# EAGLE board 27c322_adapter (EAGLE 7.6.0)
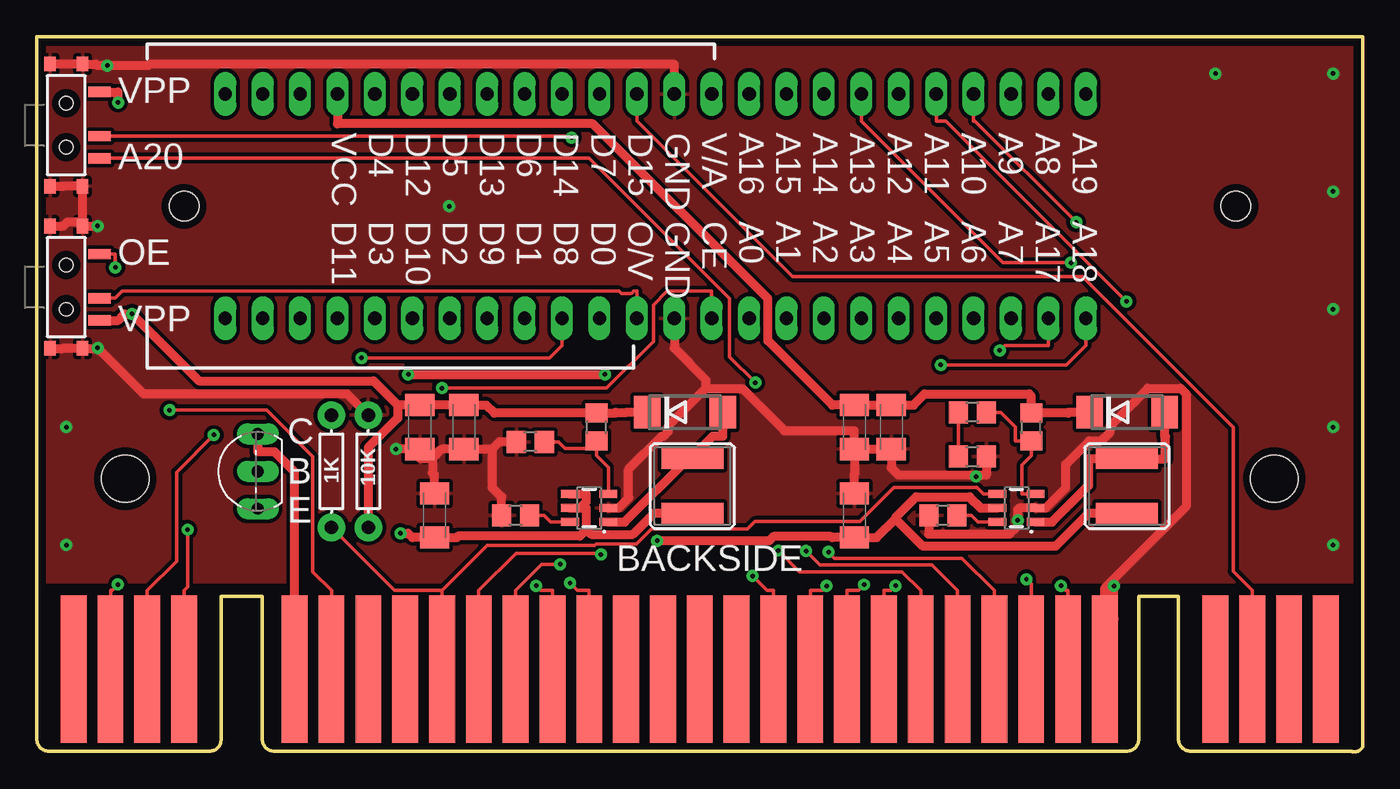
[diagram p0: board, top side]
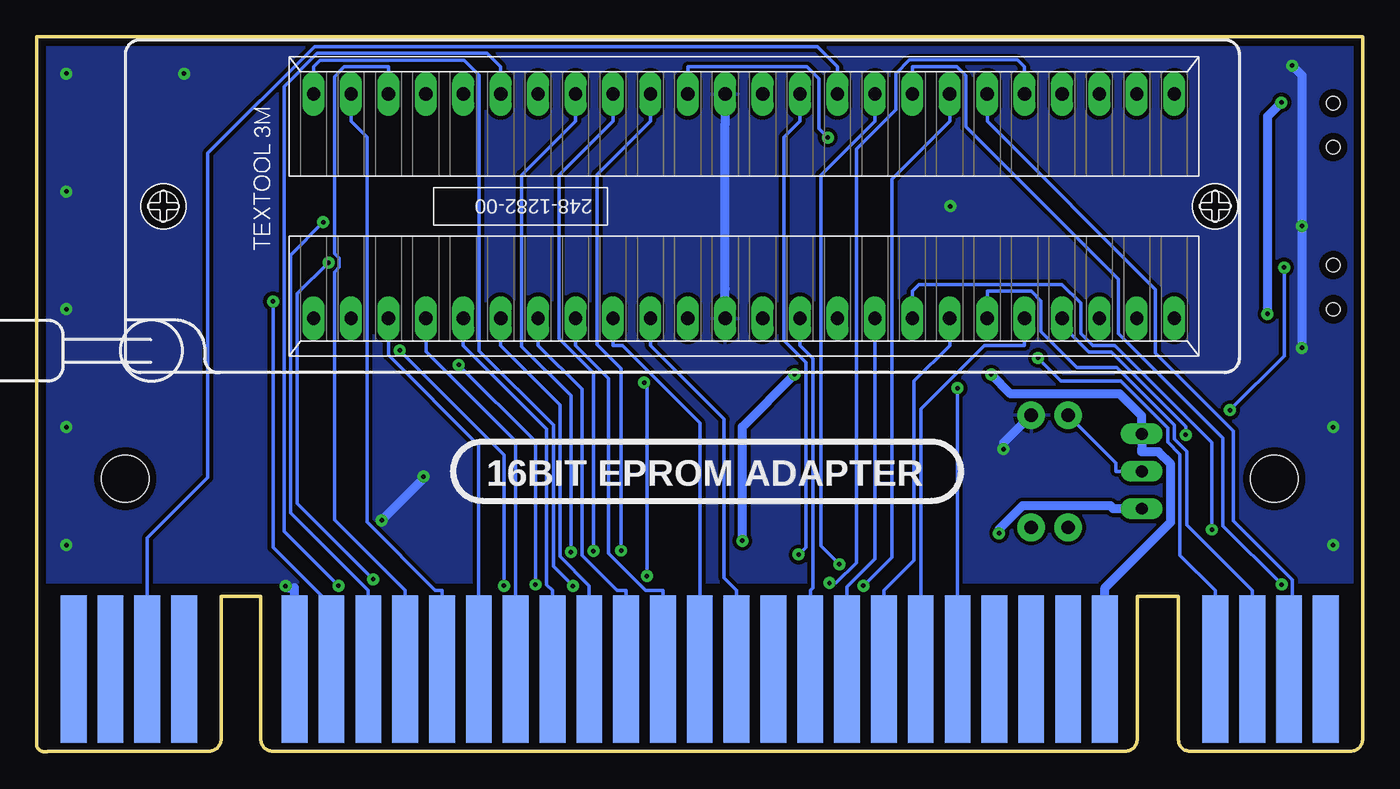
[diagram p1: board, bottom side, seen from below]

Size 90 x 48.55 mm. Coordinates in mm from the lower left corner, seen from the top.
Outline: 0,3.75 0,13.55 0,48.55 90,48.55 90,13.55 90,0.35 arc-90 89.2,0.05 78.9,0.05 78.3,0.05 arc-90 77.5,0.85 77.5,10.55 74.8,10.55 74.8,0.85 arc-90 74,0.05 16.1,0.05 arc-90 15.3,0.85 15.3,10.55 12.5,10.55 12.5,0.85 arc-90 11.8,0.05 0.8,0.05 arc-90 0,0.85
Outline: 0,3.75 0,0.85
Outline: 0,0.85 0,3.75
Outline: 0,3.75 0,0.85
Copper layers (1*16): Top 0.035mm / dielectric 1.5mm / Bottom 0.035mm
Design rules "SparkFun_small": minimum track width 8mil, minimum drill 12mil, track to track 8mil, track to pad 8mil, pad to pad 8mil, via to via 8mil, smd to smd 8mil, copper to edge 20mil, drill to drill 12mil, minimum pad ring 12mil, minimum via ring 10mil, stop-mask expansion 4mil, vias tented up to drill 25mil, thermal gap 10mil
Net classes: 0 default: width 0.254 mm, drill 0.305 mm, clearance 0.203 mm; 1 power: width 0.61 mm, drill 0.406 mm, clearance 0.203 mm; 2 gnd: width 0.61 mm, drill 0.406 mm, clearance 0.203 mm; 3 power usb: width 0.61 mm, drill 0.406 mm, clearance 0.203 mm
Holes 3.2 mm at 84,18.55 6,18.55

## Footprints (pad centres in the part's own frame; a part is rotated, then mirrored left to right if it is on the bottom)
C1206K = smd 1.5 x 2: 1 -1.5,0; 2 1.5,0
DO214AA = smd 1.8 x 2.2: A 2.55,0; C -2.55,0
CR54 = smd 4.2 x 1.4: P$1 0,1.85; P$2 0,-1.85
SMD-SWITCH = smd 0.7 x 1.5: O -2.25,2.25; P 0.75,2.25; S 2.25,2.25 | smd 1 x 0.8: P$1 -4.15,1.1; P$2 -4.15,-1.1; P$3 4.15,-1.1; P$4 4.15,1.1 | hole 0.9: -1.5,0; 1.5,0
AXIAL-0.3 = drill 0.9 pad 1.88: P$1 -3.81,0; P$2 3.81,0
R0805 = smd 1.3 x 1.5: 1 -0.95,0; 2 0.95,0
SOT23-6 = smd 0.55 x 1.2: 1 0.95,1.3; 2 0,1.3; 3 -0.95,1.3; 4 -0.95,-1.3; 5 0,-1.3; 6 0.95,-1.3
TO92-CBE = drill 0.813 long: B 0,0; C -2.54,0; E 2.54,0
CART-EXP-PINS-LONG = smd 1.75 x 10 bottom: 1 42.5,-1.42; 2 40,-1.42; 3 37.5,-1.42; 4 35,-1.42; 5 27.5,-1.42; 6 25,-1.42; 7 22.5,-1.42; 8 20,-1.42; 9 17.5,-1.42; 10 15,-1.42; 11 12.5,-1.42; 12 10,-1.42; 13 7.5,-1.42; 14 5,-1.42; 15 2.5,-1.42; 16 0,-1.42; 17 -2.5,-1.42; 18 -5,-1.42; 19 -7.5,-1.42; 20 -10,-1.42; 21 -12.5,-1.42; 22 -15,-1.42; 23 -17.5,-1.42; 24 -20,-1.42; 25 -22.5,-1.42; 26 -25,-1.42; 27 -27.5,-1.42; 28 -35,-1.42; 29 -37.5,-1.42; 30 -40,-1.42; 31 -42.5,-1.42 | smd 1.75 x 10: 32 42.5,-1.42; 33 40,-1.42; 34 37.5,-1.42; 35 35,-1.42; 36 27.5,-1.42; 37 25,-1.42; 38 22.5,-1.42; 39 20,-1.42; 40 17.5,-1.42; 41 15,-1.42; 42 12.5,-1.42; 43 10,-1.42; 44 7.5,-1.42; 45 5,-1.42; 46 2.5,-1.42; 47 0,-1.42; 48 -2.5,-1.42; 49 -5,-1.42; 50 -7.5,-1.42; 51 -10,-1.42; 52 -12.5,-1.42; 53 -15,-1.42; 54 -17.5,-1.42; 55 -20,-1.42; 56 -22.5,-1.42; 57 -25,-1.42; 58 -27.5,-1.42; 59 -35,-1.42; 60 -37.5,-1.42; 61 -40,-1.42; 62 -42.5,-1.42
248-1282-00-0602J = drill 0.9 long: 1 -29.21,-7.62; 2 -26.67,-7.62; 3 -24.13,-7.62; 4 -21.59,-7.62; 5 -19.05,-7.62; 6 -16.51,-7.62; 7 -13.97,-7.62; 8 -11.43,-7.62; 9 -8.89,-7.62; 10 -6.35,-7.62; 11 -3.81,-7.62; 12 -1.27,-7.62; 13 1.27,-7.62; 14 3.81,-7.62; 15 6.35,-7.62; 16 8.89,-7.62; 17 11.43,-7.62; 18 13.97,-7.62; 19 16.51,-7.62; 20 19.05,-7.62; 21 21.59,-7.62; 22 24.13,-7.62; 23 26.67,-7.62; 24 29.21,-7.62; 25 29.21,7.62; 26 26.67,7.62; 27 24.13,7.62; 28 21.59,7.62; 29 19.05,7.62; 30 16.51,7.62; 31 13.97,7.62; 32 11.43,7.62; 33 8.89,7.62; 34 6.35,7.62; 35 3.81,7.62; 36 1.27,7.62; 37 -1.27,7.62; 38 -3.81,7.62; 39 -6.35,7.62; 40 -8.89,7.62; 41 -11.43,7.62; 42 -13.97,7.62; 43 -16.51,7.62; 44 -19.05,7.62; 45 -21.59,7.62; 46 -24.13,7.62; 47 -26.67,7.62; 48 -29.21,7.62 | hole 2: -39.4,0; 32,0

## Placement (x,y rotation side)
C1  [C1206K]  27,16.05 90 top
C2  [C1206K]  26,22.05 270 top
C3  [C1206K]  29,22.05 270 top
C4  [C1206K]  55.5,16.05 90 top
C5  [C1206K]  55.5,22.05 270 top
C6  [C1206K]  58,22.05 270 top
D1  [DO214AA]  74,23.05 0 top
D2  [DO214AA]  44,23.05 0 top
L1  47µH/±30%/750mA  [CR54]  74,18.05 0 top
L2  47µH/±30%/750mA  [CR54]  44.5,18.05 0 top
OEVPP  SMD-SWITCH  [SMD-SWITCH]  2,31.55 270 top
OEVPP1  SMD-SWITCH  [SMD-SWITCH]  2,42.55 270 top
R1  10K  [AXIAL-0.3]  22.5,19.05 90 top
R2  1K  [AXIAL-0.3]  20,19.05 270 top
R3  30K  [R0805]  61.5,16.05 180 top
R4  10K  [R0805]  63.5,23.05 180 top
R5  191K  [R0805]  67.5,22.05 90 top
R6  30K  [R0805]  32.5,16.05 180 top
R7  10K  [R0805]  33.5,21.05 180 top
R8  191K  [R0805]  38,22.05 90 top
R10  10k  [R0805]  63.5,20.05 0 top
STEPUP_VCC  MCP4725  [SOT23-6]  66.5,16.55 270 top
STEPUP_VPP  MCP4725  [SOT23-6]  37.5,16.55 270 top
T_VPP  [TO92-CBE]  15,19.05 270 top
U$1  CART-EXP-EDGE  [CART-EXP-PINS-LONG]  45,7.05 0 top
ZX1  248-1282-00-0602J  [248-1282-00-0602J]  42,37.05 0 bottom

## Library data of the parts
C1-C6 R3-R8 R10 = resistor
D1 D2 = Arduino_MEGA_2560-Rev3
L1 L2 = SparkFun-Coils; PROD_ID: NDUC-10789
OEVPP OEVPP1 = !sanni; PROD_ID: SWCH-10651
R1 R2 = !sanni; PROD_ID: RES-9435
STEPUP_VCC STEPUP_VPP = !sanni; PROD_ID: IC-08886
T_VPP = transistor-neu-to92
U$1 = snes_cart_mod4
ZX1 = con-3m; MF: 3M; MPN: 248-1282-00-0602J; OC_FARNELL: 9897488; OC_NEWARK: 85K7866

## Nets
A0: U$1.17 ZX1.10
A1: U$1.16 ZX1.9
A2: U$1.15 ZX1.8
A3: U$1.14 ZX1.7
A4: U$1.13 ZX1.6
A5: U$1.12 ZX1.5
A6: U$1.11 ZX1.4
A7: U$1.10 ZX1.3
A8: U$1.9 ZX1.47
A9: U$1.8 ZX1.46
A9_12V: U$1.35
A10: U$1.7 ZX1.45
A11: U$1.6 ZX1.44
A12: U$1.37 ZX1.43
A13: U$1.38 ZX1.42
A14: U$1.39 ZX1.41
A15: U$1.40 ZX1.40
A16: U$1.41 ZX1.39
A17: U$1.42 ZX1.2
A18: U$1.43 ZX1.1
A19: U$1.44 ZX1.48
A20: OEVPP1.S U$1.45
CART: U$1.49
CE: U$1.23 ZX1.11
DQ0: U$1.19 ZX1.14
DQ1: U$1.20 ZX1.16
DQ2: U$1.21 ZX1.18
DQ3: U$1.22 ZX1.20
DQ4: U$1.50 ZX1.29
DQ5: U$1.51 ZX1.31
DQ6: U$1.52 ZX1.33
DQ7: U$1.53 ZX1.35
DQ8: U$1.28 ZX1.15
DQ9: U$1.59 ZX1.17
DQ10: U$1.29 ZX1.19
DQ11: U$1.60 ZX1.21
DQ12: U$1.30 ZX1.30
DQ13: U$1.61 ZX1.32
DQ14: U$1.3 ZX1.34
DQ15: U$1.34 ZX1.36
FB_VCC: R4.1 R5.1 STEPUP_VCC.3
FB_VPP: R7.1 R8.1 STEPUP_VPP.3
GND [gnd]: C1.2 C2.2 C3.2 C4.2 C5.2 C6.2 OEVPP1.P$1 OEVPP1.P$2 OEVPP1.P$3 OEVPP1.P$4 OEVPP.P$1 OEVPP.P$2 OEVPP.P$3 OEVPP.P$4 R1.P$2 R3.2 R6.2 R7.2 R10.2 STEPUP_VCC.2 STEPUP_VPP.2 U$1.5 U$1.36 ZX1.12 ZX1.37
N$1: R2.P$1 T_VPP.B
N$2: R4.2 R10.1
NC_VCC: R3.1 STEPUP_VCC.6
NC_VPP: R6.1 STEPUP_VPP.6
OE: OEVPP.O U$1.57
OEVPP: OEVPP.P ZX1.13
REFRESH: U$1.33
RST: U$1.26
SW_VCC [power usb]: D1.A L1.P$1 STEPUP_VCC.1
SW_VPP [power usb]: D2.A L2.P$1 STEPUP_VPP.1
VCC [power]: C4.1 L1.P$2 STEPUP_VCC.5 T_VPP.C U$1.27 U$1.58
VI_VPP [power usb]: C1.1 L2.P$2 STEPUP_VPP.4 STEPUP_VPP.5 T_VPP.E
VO_VCC [power usb]: C5.1 C6.1 D1.C R5.2 ZX1.28
VO_VPP [power usb]: C2.1 C3.1 D2.C OEVPP1.O OEVPP.S R1.P$1 R8.2
VPPA20: OEVPP1.P ZX1.38
WE: U$1.18
WR: R2.P$2 STEPUP_VCC.4 U$1.54

## Tracks (layer width: path | path; a pad name or v marks a point on that pad's centre or on a via)
A0
  Bottom 0.254: U$1.17 42.5,10.96 43.35,11.81 43.35,22.59 48.35,27.59 ZX1.10
A1
  Bottom 0.254: U$1.16 45,10.96 45,22.35 50.24,27.59 50.89,27.59 ZX1.9
A2
  Bottom 0.254: U$1.15 47.5,10.96 48.69,10.96 51.19,13.46 51.19,25.35 53.43,27.59 ZX1.8
A3
  Bottom 0.254: U$1.14 50,10.96 50.61,10.96 53.01,13.36 53.01,24.63 55.97,27.59 ZX1.7
A4
  Bottom 0.254: U$1.13 52.5,11.28 54.48,13.26 54.48,23.56 58.51,27.59 ZX1.6
A5
  Bottom 0.254: U$1.12 55,10.96 55.39,11.36 55.39,21.94 61.05,27.59 ZX1.5
A6
  Bottom 0.254: U$1.11 57.5,10.96 57.5,21.11 63.59,27.2 63.59,27.59 ZX1.4
A7
  Bottom 0.254: U$1.10 60,10.96 60,20.82 66.13,26.95 66.13,27.59 ZX1.3
A8
  Bottom 0.254: U$1.9 62.5,10.96 62.95,10.96 67.58,15.6 67.58,41.75 68.67,42.83 ZX1.47
A9
  Bottom 0.254: U$1.8 65,10.96 69.79,15.75 69.79,32.6 69.47,32.92 69.47,33.53 69.79,33.85 69.79,45.86 69.13,46.51 66.13,46.51 ZX1.46
A10  (via drill 0.3 pad 0.81)
  Top 0.254: ZX1.45 63.59,42.83 63.68,42.83 v70.55,35.97
  Bottom 0.254: U$1.7 67.5,10.96 72.77,16.23 72.77,33.75 v70.55,35.97
A11  (via drill 0.3 pad 0.81)
  Top 0.254: v73.97,30.58 61.72,42.83 61.05,42.83 ZX1.44
  Bottom 0.254: U$1.6 70,9.91 73.97,13.87 v73.97,30.58
A12  (via drill 0.3 pad 0.81)
  Top 0.254: v69.52,11.27 69.83,10.96 70,10.96 U$1.37
  Bottom 0.254: v69.52,11.27 73.23,14.98 73.23,45.17 70.97,47.43 59.42,47.43 58.51,46.51 ZX1.43
A13  (via drill 0.3 pad 0.81)
  Top 0.254: v67.17,11.72 67.5,11.39 U$1.38 | ZX1.42 55.97,42.83 65.58,33.22 v70.2,33.22
  Bottom 0.254: v70.2,33.22 72.31,31.11 72.31,16.86 v67.17,11.72
A14  (via drill 0.3 pad 0.81)
  Top 0.254: v53.74,13.56 54.15,13.15 62.81,13.15 65,10.96 U$1.39
  Bottom 0.254: v53.74,13.56 53.74,24.18 57.1,27.54 57.1,39.17 53.43,42.83 ZX1.41
A15  (via drill 0.3 pad 0.81)
  Top 0.254: v52.21,13.64 53.15,12.7 60.77,12.7 62.5,10.96 U$1.40
  Bottom 0.254: v52.21,13.64 52.21,25.73 54.55,28.07 54.55,39.17 50.89,42.83 ZX1.40
A16  (via drill 0.3 pad 0.81)
  Top 0.254: U$1.41 60,10.96 58.73,12.24 51.76,12.24 v50.34,13.66
  Bottom 0.254: v50.34,13.66 50.34,26.02 51.99,27.67 51.99,39.2 48.35,42.83 ZX1.39
A17  (via drill 0.3 pad 0.81)
  Top 0.254: v58.29,11.27 57.98,10.96 57.5,10.96 U$1.42 | v65.37,27.25 65.71,27.59 68.67,27.59 ZX1.2
  Bottom 0.254: v65.37,27.25 58.29,20.17 v58.29,11.27
A18  (via drill 0.3 pad 0.81)
  Top 0.254: v56.16,11.36 55.77,10.96 55,10.96 U$1.43 | ZX1.1 71.21,27.59 69.89,26.28 v61.37,26.28
  Bottom 0.254: v61.37,26.28 56.16,21.07 v56.16,11.36
A19  (via drill 0.3 pad 0.81)
  Top 0.254: v53.62,11.26 53.32,10.96 52.5,10.96 U$1.44
  Bottom 0.254: v53.62,11.26 54.94,12.58 54.94,22.19 59.97,27.22 59.97,45.93 61,46.97 70.75,46.97 71.21,46.51 ZX1.48
A20  (via drill 0.3 pad 0.81)
  Top 0.254: v48.59,11.94 49.57,10.96 50,10.96 U$1.45 | v48.77,25.08 47.02,26.83 47.02,30.78 37.49,40.3 OEVPP1.S
  Bottom 0.254: v48.77,25.08 48.59,24.9 v48.59,11.94
CE  (via drill 0.3 pad 0.81)
  Top 0.254: v27.5,24.7 38.67,24.7 41.85,27.88 41.85,30.34 42.79,31.27 45.81,31.27 ZX1.11
  Bottom 0.254: U$1.23 v27.5,24.7
DQ0
  Bottom 0.254: U$1.19 37.5,10.96 37.32,11.14 37.32,26.73 38.19,27.59 ZX1.14
DQ1
  Bottom 0.254: U$1.20 35,10.96 35,11.22 33.11,13.11 33.11,27.59 ZX1.16
DQ2
  Bottom 0.254: U$1.21 32.5,10.96 30.46,13.01 30.46,25.17 28.03,27.59 ZX1.18
DQ3
  Bottom 0.254: U$1.22 30,10.96 30,23.27 25.68,27.59 22.95,27.59 ZX1.20
DQ4  (via drill 0.3 pad 0.81)
  Top 0.254: U$1.50 37.5,10.96 36.69,10.96 v36.2,11.46
  Bottom 0.254: ZX1.29 22.95,46.51 23.43,46.99 30.75,46.99 31.68,46.06 31.68,43.62 34.38,40.92 34.38,12.84 35.75,11.46 v36.2,11.46 | v36.2,11.46
DQ5  (via drill 0.3 pad 0.81)
  Top 0.254: v33.9,11.27 34.21,10.96 35,10.96 U$1.51
  Bottom 0.254: 31.97,13.2 31.97,38.89 28.03,42.83 ZX1.31 | 31.97,13.2 | 31.97,13.2 v33.9,11.27
DQ6  (via drill 0.3 pad 0.81)
  Top 0.254: U$1.52 32.5,10.96 34.27,12.73 v35.53,12.73
  Bottom 0.254: ZX1.33 33.11,42.83 36.78,39.16 36.78,13.99 v35.53,12.73
DQ7  (via drill 0.3 pad 0.81)
  Top 0.254: U$1.53 30,10.96 32.52,13.48 38.2,13.48 v38.28,13.4
  Bottom 0.254: ZX1.35 38.19,42.83 39.27,41.75 39.27,27.94 37.78,26.44 37.78,13.9 v38.28,13.4
DQ8  (via drill 0.3 pad 0.81)
  Top 0.254: v22.04,26.76 34.81,26.76 35.65,27.59 ZX1.15
  Bottom 0.254: v22.04,26.76 20.47,25.19 16.42,25.19 13.23,22.01 13.23,21.04 12.39,20.21 12.39,13.36 10,10.96 U$1.28
DQ9  (via drill 0.3 pad 0.81)
  Top 0.254: v10.23,15.09 10.23,11.19 10,10.96 U$1.59
  Bottom 0.254: v10.23,15.09 10.23,21.01 16.81,27.59 18.32,27.59 19.14,28.41 19.14,30.46 20.41,31.73 30.11,31.73 30.57,31.27 ZX1.17
DQ10
  Bottom 0.254: U$1.29 7.5,10.96 11.94,15.4 11.94,20.4 12.77,21.23 12.77,22.2 16.68,26.11 19.4,26.11 21.84,28.56 21.84,30.62 22.5,31.27 25.49,31.27 ZX1.19
DQ11  (via drill 0.3 pad 0.81)
  Top 0.254: U$1.60 7.5,10.96 9.48,12.95 9.48,18.99 v12.02,21.52
  Bottom 0.254: ZX1.21 20.41,28.97 18.57,27.14 17.06,27.14 12.02,22.09 v12.02,21.52
DQ12
  Bottom 0.254: U$1.30 4.76,5.87 4.76,11.67 8.77,15.67 8.77,21.78 14.06,27.07 14.06,31.4 25.49,42.83 ZX1.30
DQ13  (via drill 0.3 pad 0.81)
  Top 0.254: U$1.61 5,10.96 5.1,10.96 v5.5,11.36
  Bottom 0.254: ZX1.32 30.57,46.51 27.55,46.51 26.95,45.9 26.95,42.45 16.6,32.1 16.6,28.41 9.49,21.31 9.49,15.35 v5.5,11.36
DQ14
  Bottom 0.254: ZX1.34 35.65,46.51 37.02,47.89 71.16,47.89 78.39,40.65 78.39,18.62 82.5,14.52 U$1.3
DQ15
  Top 0.254: U$1.34 82.5,10.96 81.2,12.26 81.2,22.04 70.97,32.27 51.29,32.27 40.73,42.83 ZX1.36
FB_VCC
  Top 0.254: STEPUP_VCC.3 66.87,17.5 66.87,19.49 67.5,20.12 R5.1 66.42,21.1 66.42,22.06 65.43,23.05 R4.1
FB_VPP
  Top 0.254: R7.1 35.43,21.05 35.87,20.61 38,20.61 | 38,20.61 38,20.12 38.8,19.32 STEPUP_VPP.3 | R8.1 38,20.61
GND  (via drill 0.3 pad 0.81)
  Top 0.61: 45.4,24.66 47.89,24.66 50.74,21.81 55.5,21.81 C5.2 | STEPUP_VPP.2 39.48,16.55 40.18,17.25 40.18,19.2 42.42,21.45 42.56,21.45 42.86,21.74 42.86,22.12 45.4,24.66 | 45.4,24.66 45.4,25.28 43.27,27.42 ZX1.12 | v24.39,20.55 24.49,20.55 C2.2 26,19.92 26.86,19.92 | R1.P$2 21.04,24.33 7.22,24.33 v4.13,27.42 4.03,27.42 4.01,27.4 OEVPP.P$4 1.81,27.4 OEVPP.P$3 | 3.1,35.96 OEVPP1.P$4 1.81,38.4 OEVPP1.P$3 | 72.5,8.39 73.11,9 v73.11,11.27 | 72.5,8.39 72.5,11.14 78.03,16.67 78.03,24.31 77.66,24.69 75.42,24.69 72.86,22.13 72.86,21.74 72.23,21.11 71.43,21.11 69.85,19.53 69.85,17.92 68.48,16.55 STEPUP_VCC.2 66.69,16.55 66.58,16.44 v66.58,15.72 66.58,15.34 66.03,14.8 60.55,14.8 R3.2 | U$1.36 72.5,8.39 | 63.75,18.8 64.45,18.8 R10.2 | 63.75,18.8 58.5,18.8 58,19.3 C6.2 C5.2 | v63.75,18.69 63.75,18.8 | ZX1.37 43.27,46.69 7.66,46.69 7.57,46.59 v4.79,46.59 4.12,46.59 4.01,46.7 OEVPP1.P$1 OEVPP1.P$2 | R6.2 31.55,17.31 30.89,17.97 30.89,20.55 | 30.89,20.55 31.39,21.05 R7.2 | 30.89,20.55 C3.2 27.49,20.55 26.86,19.92 | 26.86,19.92 26.86,18.95 27,18.81 C1.2 | 3.1,35.96 2.06,35.96 1.81,35.7 OEVPP.P$2 | C5.2 55.5,18.81 C4.2 | v4.13,35.7 4.01,35.7 OEVPP.P$1 3.1,35.96
  Bottom 0.61: R1.P$2 24.39,20.98 v24.39,20.55 | v4.13,27.42 v4.13,35.7 4.13,45.93 v4.79,46.59 | U$1.36 72.5,11.14 72.98,11.14 v73.11,11.27 | v63.75,18.69 63.75,18.56 v66.58,15.72 | ZX1.37 43.27,42.66 43.27,31.45 ZX1.12
  other vias: 28,37.05 80,46.05 88,46.05 88,38.05 88,30.05 88,22.05 88,14.05 2,14.05 2,22.05
  pour Bottom (isolate 0.254): 0,48.55 0,11.55 90,11.55 90,48.55
  pour Top (isolate 0.254): 0,48.55 0,11.55 90,11.55 90,48.55
N$1
  Bottom 0.254: T_VPP.B 16.75,19.05 16.75,19.62 R2.P$1
N$2
  Top 0.254: R10.1 R4.2
NC_VCC
  Top 0.254: R3.1 63.43,16.05 63.88,15.6 STEPUP_VCC.6
NC_VPP
  Top 0.254: R6.1 34.43,16.05 34.88,15.6 STEPUP_VPP.6
OE  (via drill 0.3 pad 0.81)
  Top 0.254: U$1.57 20,10.96 18.73,12.23 18.73,20.06 15.59,23.2 v9.01,23.2 | v5.33,32.9 5.33,33.8 OEVPP.O
  Bottom 0.254: v9.01,23.2 5.33,26.88 v5.33,32.9
OEVPP
  Top 0.254: OEVPP.P 5.33,30.8 5.8,31.28 39.53,31.28 39.7,31.11 40.31,31.11 40.36,31.16 40.4,31.16 40.51,31.27 40.73,31.27 ZX1.13
SW_VCC
  Top 0.61: STEPUP_VCC.1 68.91,15.6 71.39,18.09 71.39,19.9 L1.P$1 76.61,19.9 76.61,21.39 76.55,21.45 D1.A
SW_VPP
  Top 0.61: D2.A 46.55,21.45 45.9,21.45 44.35,19.9 | 44.35,19.9 L2.P$1 | 44.35,19.9 44.21,19.9 39.91,15.6 STEPUP_VPP.1
VCC  (via drill 0.3 pad 0.81)
  Top 0.61: v25.21,25.62 v38.56,25.62 | v42.11,14.33 49.71,14.33 50,14.62 53.92,14.62 53.99,14.55 C4.1 57.01,14.55 58.28,15.83 | U$1.58 17.5,11.14 17.5,19.01 16.14,20.37 15,20.37 T_VPP.C | 58.28,15.83 58.28,15.92 59.68,17.31 63.31,17.31 64.07,16.55 STEPUP_VCC.5 | 58.28,15.83 60.16,13.95 69.14,13.95 71.39,16.2 L1.P$2
  Bottom 0.61: v25.21,25.62 23.9,24.31 16.5,24.31 15,22.81 T_VPP.C 15,20.54 15,20.37 13.86,20.37 13.03,19.54 13.03,15.61 17.5,11.14 U$1.58 | v42.11,14.33 42.11,22.07 v38.56,25.62
VI_VPP  (via drill 0.3 pad 0.81)
  Top 0.61: 37.31,15.1 36.87,14.65 28.61,14.65 28.51,14.55 C1.1 26.25,14.55 25.49,14.55 25.2,14.85 v24.68,14.85 | 36.86,16.55 37.31,17 37.31,17.5 STEPUP_VPP.4 | 36.86,16.55 36.75,16.55 STEPUP_VPP.5 | 36.86,16.55 37.31,16.55 | 37.31,15.1 37.31,16.55 | 37.31,16.55 | 37.31,15.1 37.62,14.78 40.47,14.78 41.89,16.2 L2.P$2
  Bottom 0.61: T_VPP.E 16.93,16.51 17.13,16.71 23.08,16.71 24.68,15.11 v24.68,14.85
VO_VCC
  Top 0.61: ZX1.28 20.41,42.66 37.73,42.66 49.62,30.77 49.62,27.93 53.99,23.55 C5.1 C6.1 59.51,23.55 60.27,24.31 67.35,24.31 67.5,24.16 R5.2 69.99,23 70.04,23.05 D1.C
VO_VPP  (via drill 0.3 pad 0.81)
  Top 0.61: 24.49,23.55 22.86,25.18 11.02,25.18 v6.46,29.74 5.95,29.74 5.51,29.3 OEVPP.S | v5.51,44.1 5.51,44.8 OEVPP1.O | 24.49,23.55 24.49,22.66 22.5,20.67 R1.P$1 | D2.C 40.04,23.05 39.31,23.05 39.26,23 R8.2 31.06,23 30.51,23.55 C3.1 C2.1 24.49,23.55
  Bottom 0.61: v5.51,44.1 6.46,43.14 v6.46,29.74
VPPA20  (via drill 0.3 pad 0.81)
  Top 0.254: OEVPP1.P 36.21,41.8 v36.3,41.71
  Bottom 0.254: ZX1.38 45.81,46.51 37.73,46.51 36.92,45.7 36.92,42.33 v36.3,41.71
WR
  Top 0.254: 27.5,10.96 30.55,14.02 37.86,14.02 37.98,14.13 40.72,14.13 41.71,15.13 48.23,15.13 48.74,15.63 55.86,15.63 58.17,17.95 63.82,17.95 64.27,17.5 STEPUP_VCC.4 | 27.5,10.96 27.5,10.85 U$1.54 | 27.5,10.96 24.28,10.96 R2.P$2

## Text on the board
bPlace: 16BIT EPROM ADAPTER
tNames: VPP | A19 / A8 / A9 / A10 / A11 / A12 / A13 / A14 / A15 / A16 / V/A / GND / D15 / D7 / D14 / D6 / D13 / D5 / D12 / D4 / VCC | A20 | A18 / A17 / A7 / A6 / A5 / A4 / A3 / A2 / A1 / A0 / CE / GND / O/V / D0 / D8 / D1 / D9 / D2 / D10 / D3 / D11 | OE | VPP | C / B / E | BACKSIDE